# Altium PCB PCB_Pedal.PcbDoc
Units mm, origin at the board's own origin, x right, y up, seen from the top; angles counter-clockwise.
Board outline 50 x 50 mm, 2 copper layers (Top Layer, Bottom Layer); 21 components, 12 nets, 50 pads, 0 vias.
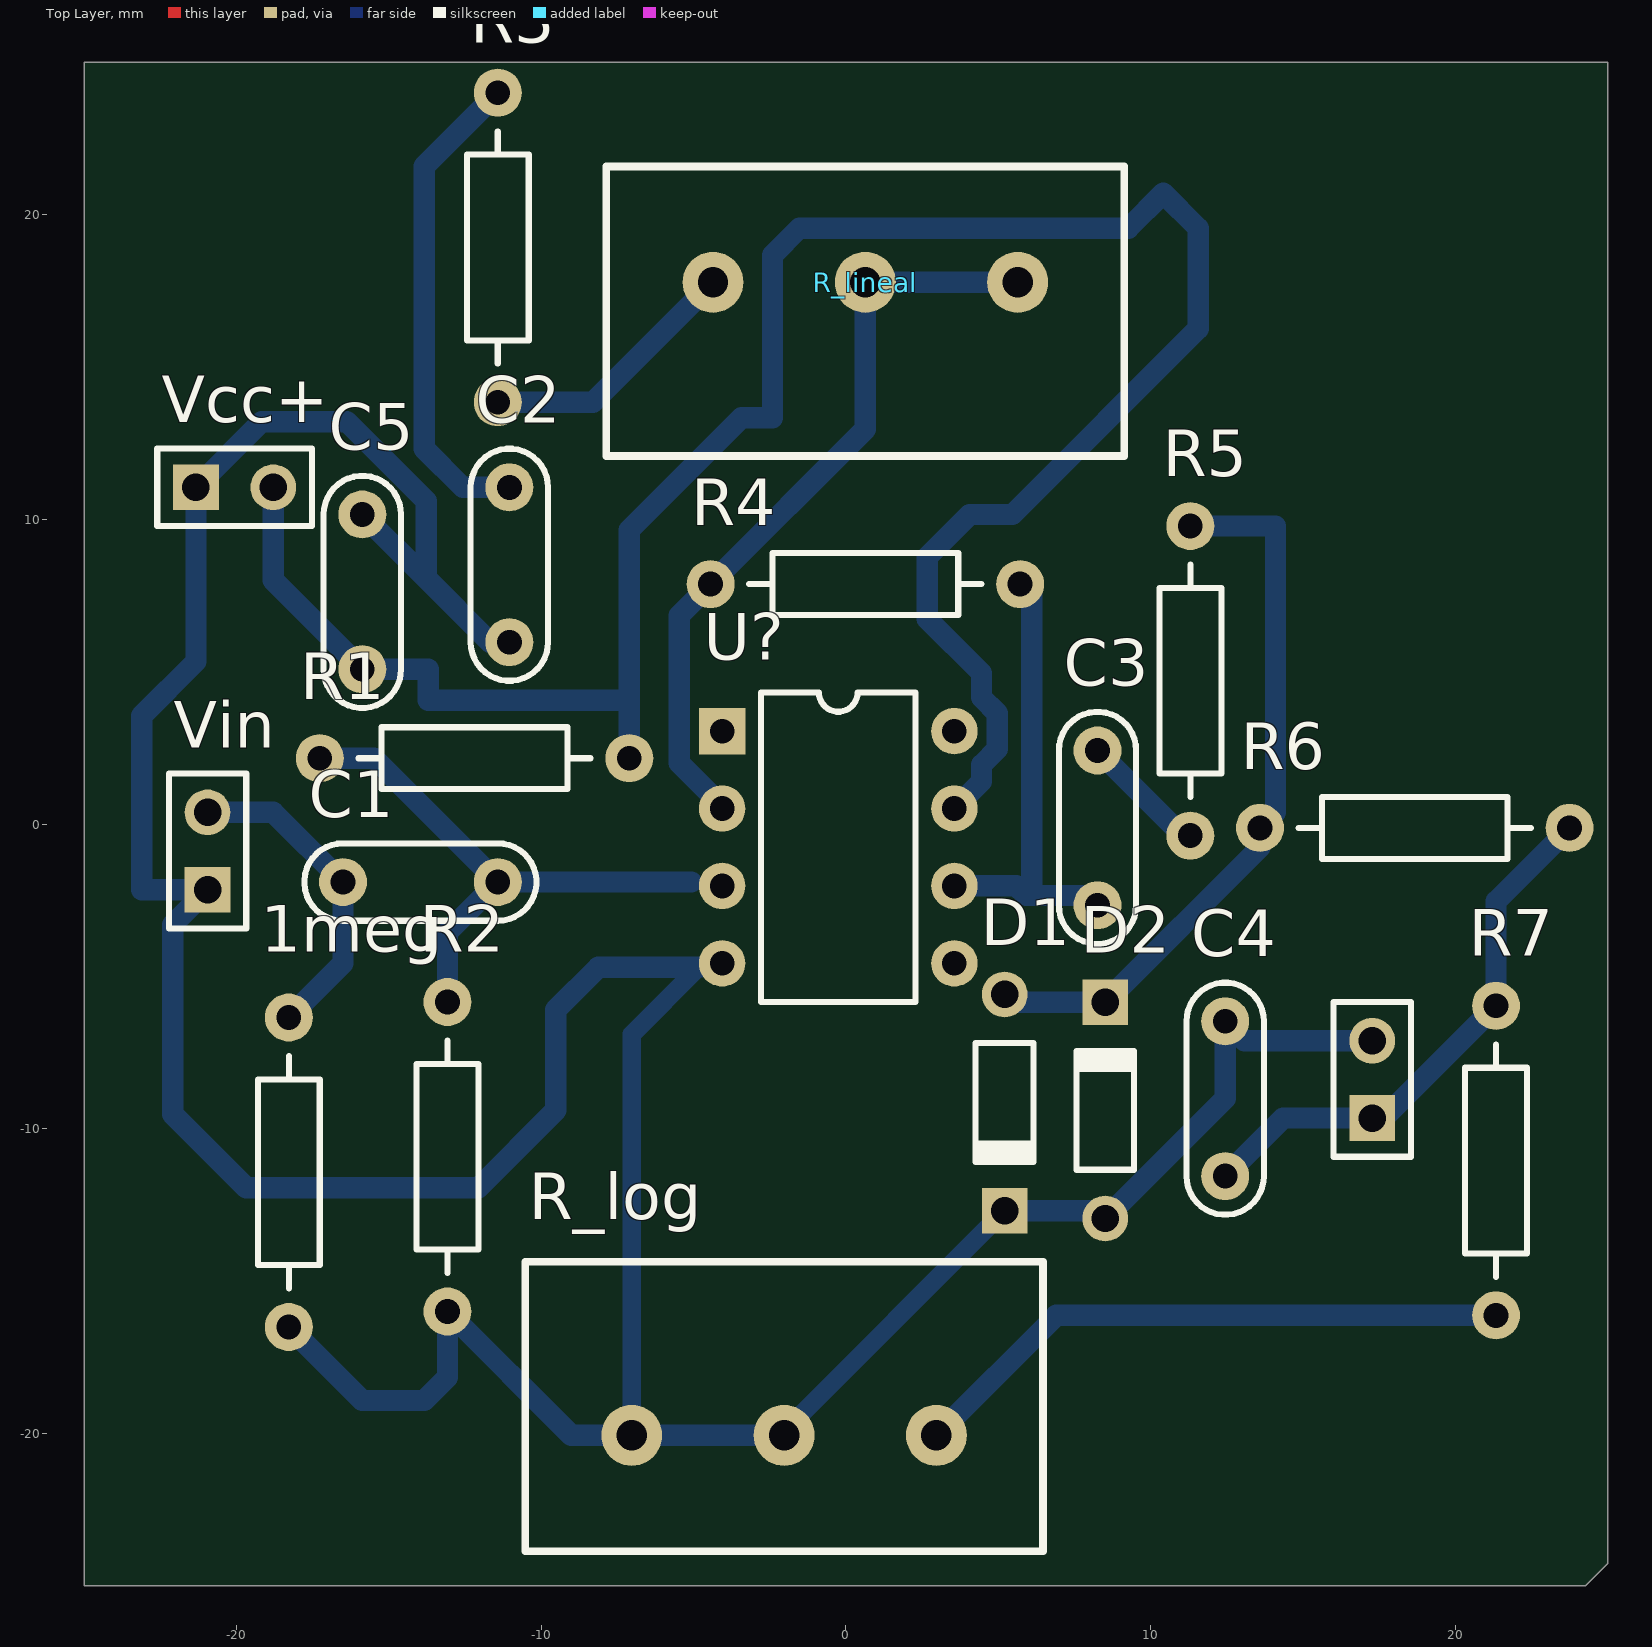
[diagram p0: Top Layer view]
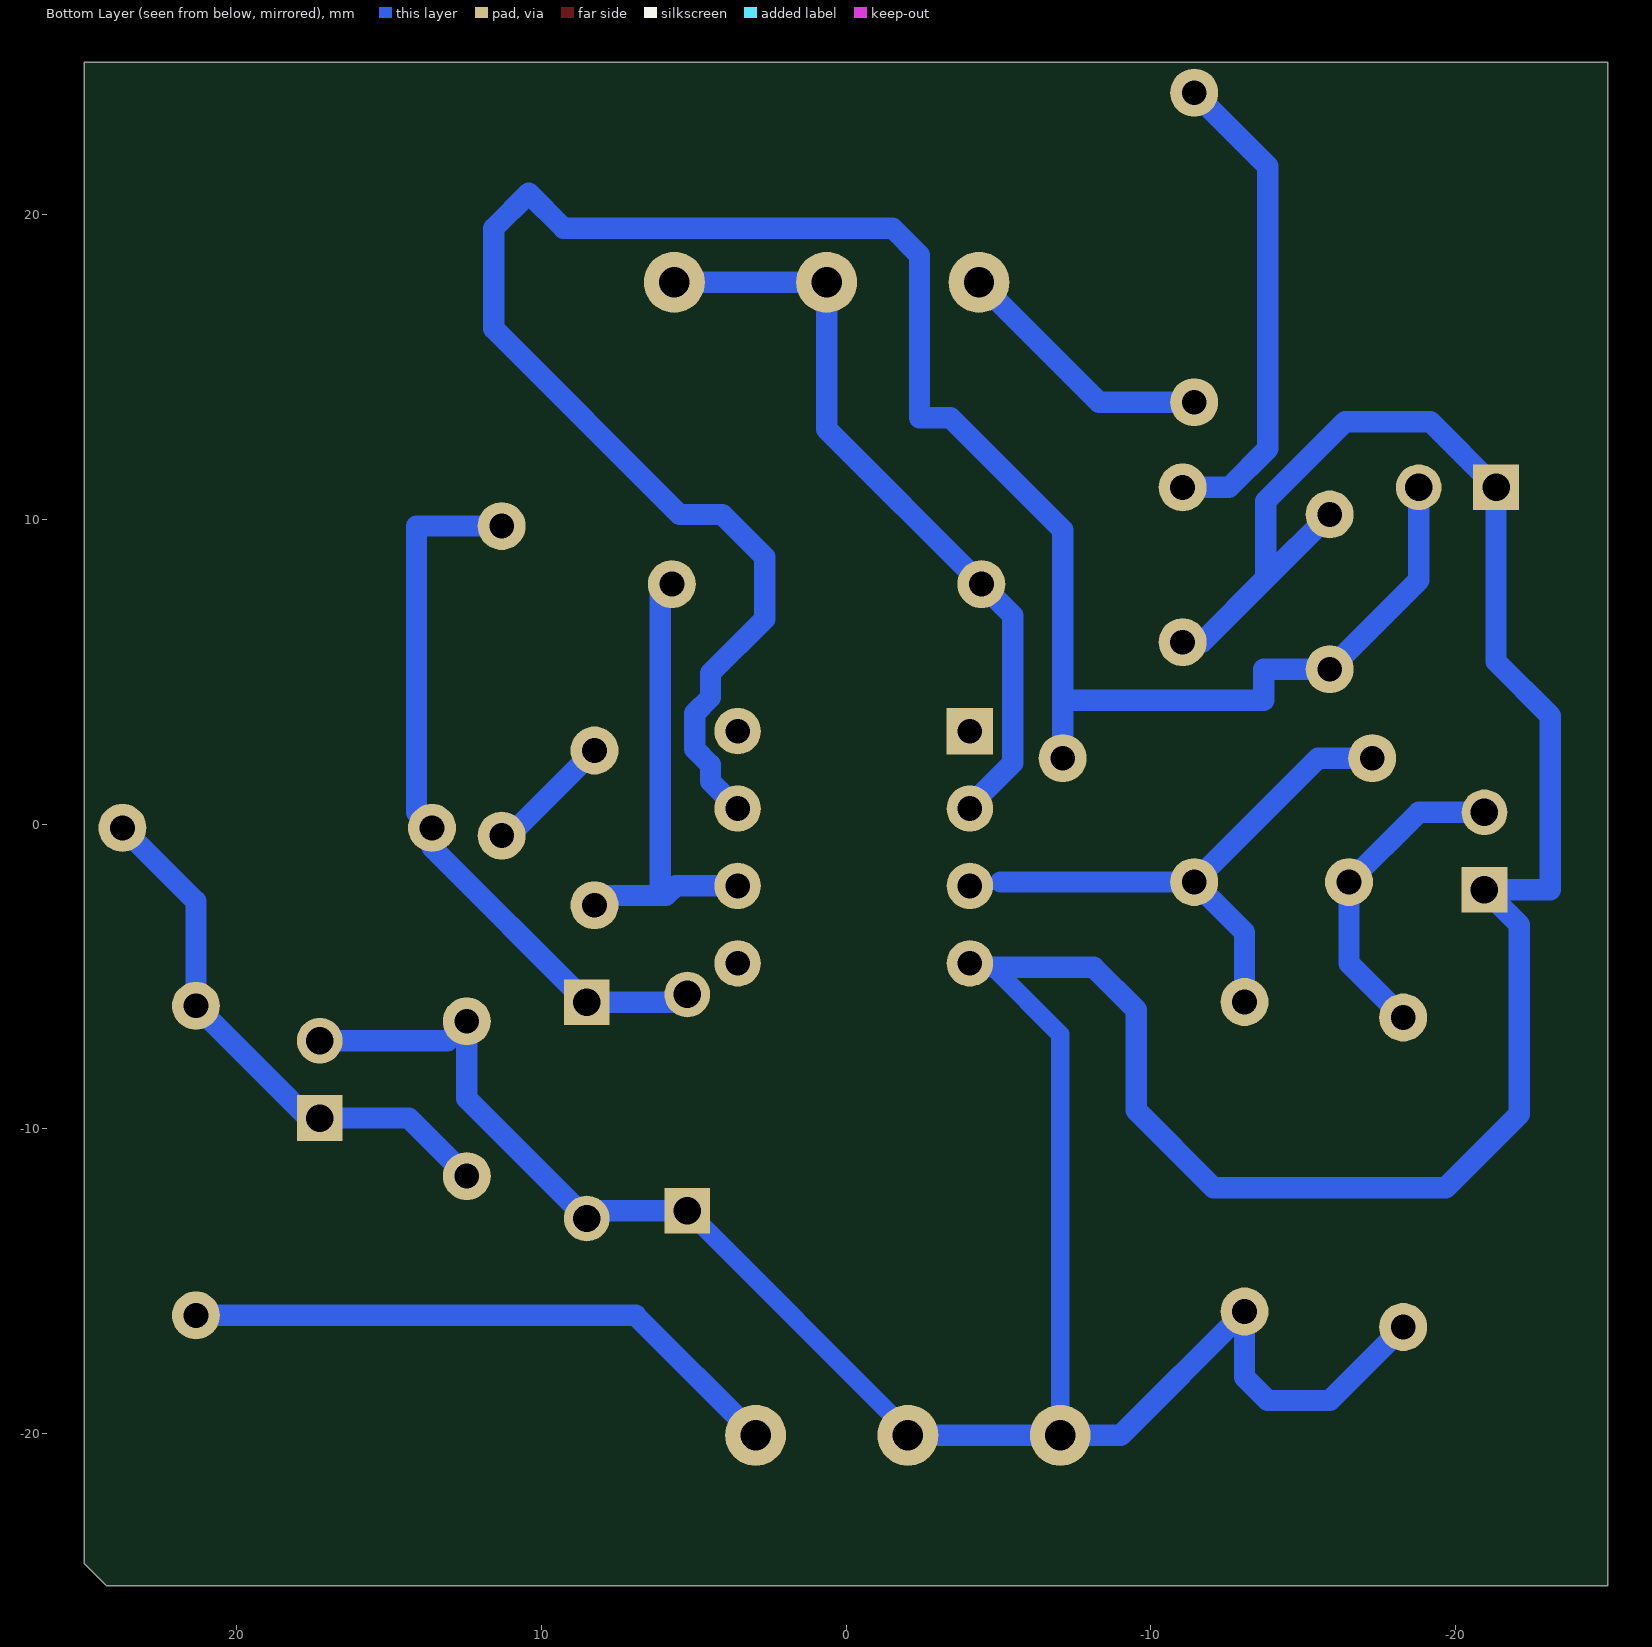
[diagram p1: Bottom Layer view, seen from below]
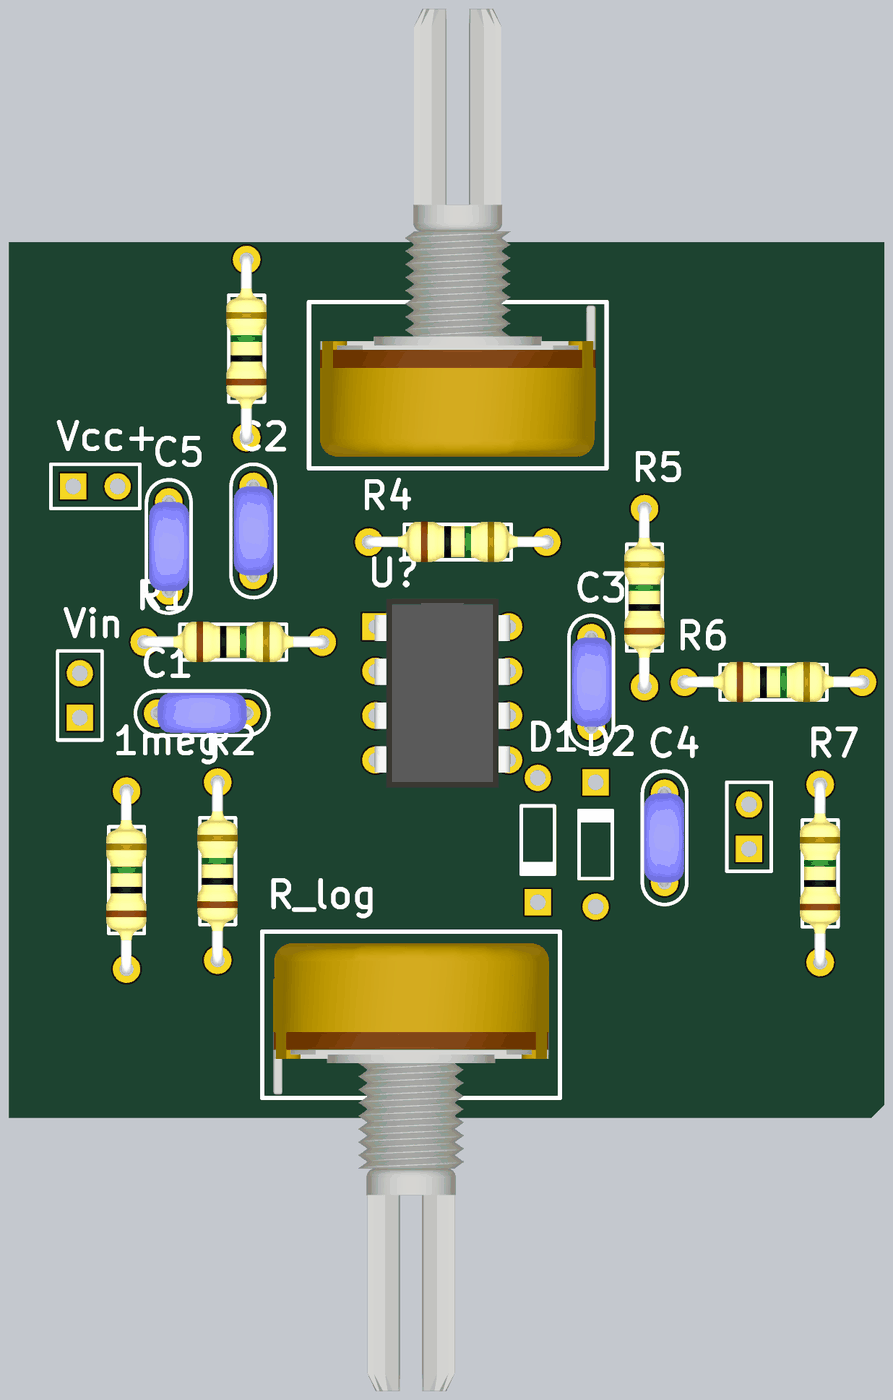
[diagram p2: 3D render of the assembled board from above, using the file's embedded part models]

## Layer stack, top to bottom
Top Solder: solder mask 0.0102, Solder Resist, Dk 3.5
Top Layer: signal copper 0.0356
Dielectric 1: dielectric 0.32, FR-4, Dk 4.8
Bottom Layer: signal copper 0.0356
Bottom Solder: solder mask 0.0102, Solder Resist, Dk 3.5

## Board outline
-25,25 25,25 25,-24.276 24.276,-25 -25,-25

## Design rules (kind name [scope] priority, off if disabled: settings)
Clearance [All] p1: gap=0.3 ignorepadtopadclearanceinfootprint=FALSE except(0: Arc-Hole Track-Hole SMDPad-Hole THPad-Hole Via-Hole Fill-Hole Poly-Hole Region-Hole Text-Hole)
PolygonConnect [All] p1: connectstyle=Relief reliefconductorwidth=0.254 reliefentries=4 polygonreliefangle="90 Angle" airgapwidth=0.254
RoutingVias [All] p1: holewidth=0.4 width=1.7 viastyle="Through Hole" minholewidth=0.3 minwidth=1.5 maxholewidth=0.5 maxwidth=2
SolderMaskExpansion [All] p1: expansion=0.102
Width [All] p1: maxlimit=0.9 minlimit=0.6 preferedwidth=0.7
30 further rules are at their usual default settings.

## Components (designator, comment, footprint, x,y, rotation, side; value= is the part's Value field where it differs from the comment)
1meg "R8" RES400 -18.288,-16.51 r90 top
C1 "1uF" CAP200 -13.97,-1.905 r180 top
C2 "1uF" CAP200 -11.049,8.509 r90 top
C3 "1uF" CAP200 8.255,-0.127 r90 top
C4 "1n" CAP200 12.446,-9.017 r270 top
C5 "1uF" CAP200 -15.875,7.62 r90 top
D1 "Diode 1N4148" DO-35 5.207,-9.144 r270 top
D2 "Diode 1N4148" DO-35 8.509,-9.398 r90 top
R1 "47k" RES400 -17.272,2.159 r0 top
R2 "47k" RES400 -13.081,-16.002 r90 top
R3 "10k" RES400 -11.43,13.843 r90 top
R4 "100k" RES400 -4.445,7.874 r0 top
R5 "10k" RES400 11.303,-0.381 r90 top
R6 "1k" RES400 13.589,-0.127 r0 top
R7 "10k" RES400 21.336,-16.129 r90 top
R_lineal "POTE" POTENCIOMETRO 0.635,17.78 r180 top
R_log "POTE" POTENCIOMETRO -2.032,-20.066 r0 top
U? "LM741" DIP8 -4.064,3.048 r0 top
Vcc+ "Header 2" HDR1X2 -21.336,11.049 r0 top
Vin "Header 2" HDR1X2 -20.955,-2.159 r90 top
? "Header 2" HDR1X2 17.272,-9.652 r90 top

## Footprints (in the part's own frame and the unit in brackets; to place one, negate y for a bottom-side part, rotate by r counter-clockwise, add the part's x,y. Pads: shape width x height; smd on the part's side, far side on the other; paste and mask are expansions set on the pad)
CAP200 [mil]
  round 62 hole 32: 1(-100,0) 2(100,0)
  silkscreen extent -150,-50 150,50, body extent -110,-46 110,44, height 246
DIP8 [mil]
  rect 60x60 hole 32: 1(0,0)
  round 60 hole 32: 2(0,-100) 3(0,-200) 4(0,-300) 5(300,-300) 6(300,-200) 7(300,-100) 8(300,0)
  silkscreen extent 50,-350 250,50, body extent -3,-363 303,63, height 177
DO-35 [mm] "Diode, Axial; Body 3.8 x 1.9 mm (LxDia. max), Lead Dia. 0.53 mm (max)"
  round 1.5 hole 0.9: 1(-3.55,0)
  rect 1.5x1.5 hole 0.9: 2(3.55,0)
  silkscreen extent -1.95,-0.95 2.05,0.95
HDR1X2 [mm] "Connector; Header; 2 Position"
  rect 1.5x1.5 hole 0.9: 1(0,0)
  round 1.5 hole 0.9: 2(2.54,0)
  silkscreen extent -1.27,-1.27 3.81,1.27
POTENCIOMETRO [mm]
  round 2 hole 1: 1(-5,0) 2(0,0) 3(5,0)
  silkscreen extent -8.5,-3.8 8.5,5.7, body extent -7.87,-20.53 7.87,5.03, height 20.12
RES400 [mil]
  round 62 hole 32: 1(0,0) 2(400,0)
  silkscreen extent 50,-40 350,40, body extent -12,-45 412,46, height 96

## Part data
1meg R1 R2 R3 R4 R5 R6 R7: library part RES
C1 C2 C3 C4 C5: library part CAP
D1 D2: "High Conductance Fast Diode", Code_JEDEC=DO-204-AH, ComponentLink1Description="Manufacturer Link", ComponentLink1URL=http://www.fairchildsemi.com/, ComponentLink2Description=Datasheet, ComponentLink2URL=http://www.fairchildsemi.com/ds/1N%2F1N4148.pdf, DatasheetVersion=1997, LatestRevisionDate=17-Jul-2002, LatestRevisionNote="Re-released for DXP Platform.", PackageDescription="Diode, Axial; Body 3.8 x 1.9 mm (LxDia. max), Lead Dia. 0.53 mm (max)", PackageReference=DO-35, Published=8-Jun-2000, Publisher="Altium Limited"
R_lineal R_log: library part POTENCIOMETRO
U?: "LM741 Operational Amplifier"
Vcc+ Vin ?: "Header, 2-Pin", LatestRevisionDate=17-Jul-2002, LatestRevisionNote="Re-released for DXP Platform.", Publisher="Altium Limited"

## Nets (pads, with @x,y where several pads share a name; then routed paths per layer and width w, separated by ;. In a path a pad name is that pad's centre, name@x,y a point inside that pad or via, vN(x,y) a via of type N, cw(c..) or ccw(c..) an arc to the next point about the centre after c; other vN are vias at no path point)
GND: 1meg.1 ?.2 C2.1 C4.1 C5.2 D1.2 D2.1 R2.1 R_log.1 R_log.2 U?.4 Vcc+.1 Vin.1 | length 131
  Bottom Layer w0.254: C2.1@-11.684,5.969 C2.1 ; R_log.2 R_log.2@-2.032,-19.933 ; D2.1 D2.1@8.763,-12.694
  Bottom Layer w0.6: R_log.1 -7.032,-6.905 -4.826,-4.699 ; R_log.2@-2.032,-19.933 D1.2
  Bottom Layer w0.7: 1meg.1@-18.288,-16.891 1meg.1 -15.875,-18.923 -13.843,-18.923 -13.081,-18.161 R2.1 -9.017,-20.066 R_log.1 R_log.2 ; C5.2 -13.779,8.064 ; C2.1@-11.684,5.969 -13.779,8.064 ; -4.826,-4.699 -8.128,-4.699 -9.525,-6.096 -9.525,-9.398 -12.065,-11.938 -19.685,-11.938 -22.098,-9.525 -22.098,-3.302 Vin.1 -23.114,-2.159 -23.114,3.556 -21.336,5.334 Vcc+.1 -19.177,13.208 -16.383,13.208 -13.779,10.604 -13.779,8.064 ; D1.2 8.763,-12.694 12.446,-9.011 C4.1 13.081,-7.112 ?.2
Net1meg_2: 1meg.2 C1.2 Vin.2 | length 10.6
  Bottom Layer w0.7: Vin.2 -18.796,0.381 C1.2 -16.51,-4.572 1meg.2
Net_1: ?.1 C4.2 R6.2 R7.2 | length 18
  Bottom Layer w0.7: C4.2 14.351,-9.652 ?.1 17.653,-9.652 R7.2 21.336,-2.54 R6.2
NetC1_1: C1.1 R1.1 R2.2 U?.3 | length 18.5
  Bottom Layer w0.7: R1.1 -15.494,2.159 C1.1 ; R2.2 -13.081,-3.556 C1.1 ; -5.08,-1.905 C1.1
NetC2_2: C2.2 R3.2 | length 16
  Bottom Layer w0.7: R3.2 -13.843,21.59 -13.843,12.319 -12.573,11.049 C2.2
NetC3_1: C3.1 R4.2 U?.6 | length 15.4
  Bottom Layer w0.7: U?.6 5.588,-2.032 5.905,-2.349 ; R4.2 6.096,7.493 6.096,-2.159 5.905,-2.349 ; C3.1 7.938,-2.349 5.905,-2.349
NetC3_2: C3.2 R5.1 | length 4.2
  Bottom Layer w0.7: C3.2 11.049,-0.381 R5.1
NetD1_1: D1.1 D2.2 R5.2 R6.1 | length 24.1
  Bottom Layer w0.7: D1.1 5.461,-5.848 D2.2 13.589,-0.768 R6.1 14.097,0.381 14.097,9.779 R5.2
NetLabel1: C5.1 R1.2 U?.7 Vcc+.2 | length 76.4
  Bottom Layer w0.7: Vcc+.2 -18.796,8.001 C5.1 -13.716,5.08 -13.716,4.064 -7.112,4.064 ; R1.2 -7.112,4.064 ; U?.7 4.445,1.397 4.445,1.94 4.968,2.463 4.968,3.633 4.445,4.156 4.445,4.953 2.667,6.731 2.667,8.763 4.064,10.16 5.461,10.16 11.557,16.256 11.557,19.558 10.414,20.701 9.271,19.558 -1.524,19.558 -2.413,18.669 -2.413,13.335 -3.429,13.335 -7.112,9.652 -7.112,4.064
NetR3_1: R3.1 R_lineal.3 | length 8.7
  Bottom Layer w0.7: R3.1 -8.302,13.843 R_lineal.3
NetR4_1: R4.1 R_lineal.1 R_lineal.2 U?.2 | length 25.4
  Bottom Layer w0.7: U?.2 -4.064,0.59 -5.476,2.002 -5.476,6.843 R4.1 0.635,12.954 R_lineal.2 R_lineal.1
NetR7_1: R7.1 R_log.3 | length 20
  Bottom Layer w0.7: R_log.3 6.905,-16.129 R7.1
pads on no net: U?.1 U?.5 U?.8